# EAGLE board prototype.01 (EAGLE 5.06)
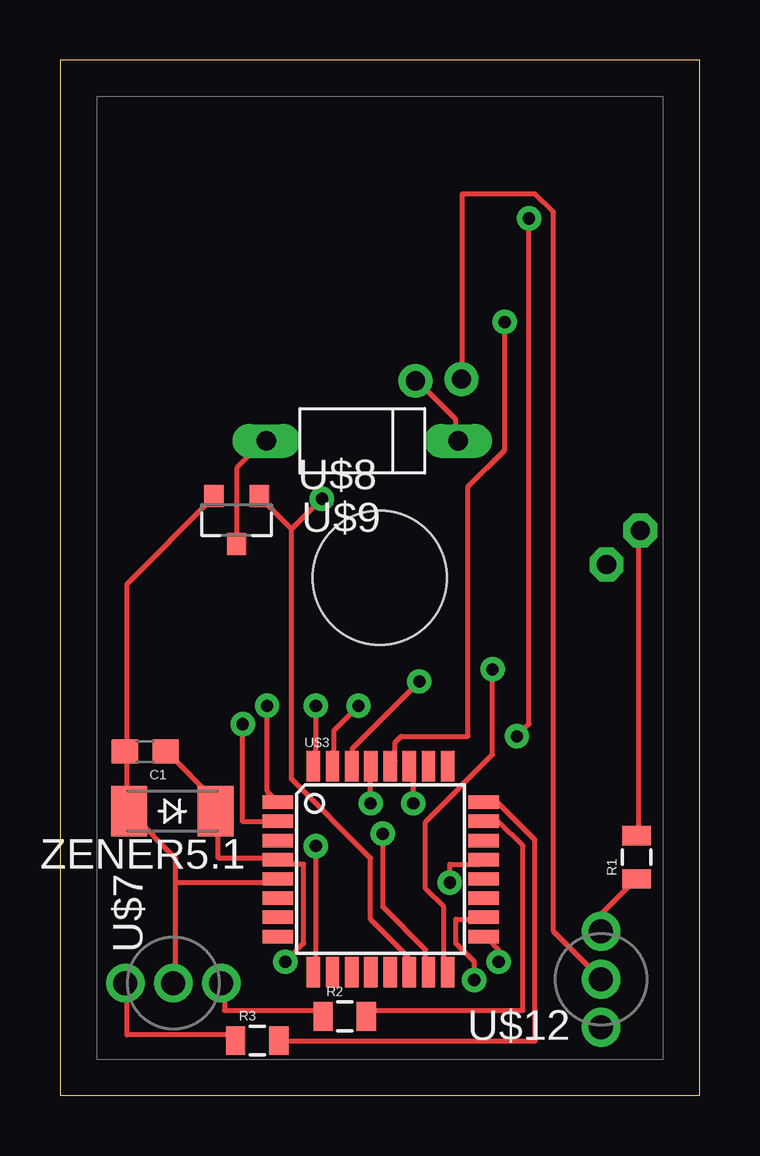
[diagram p0: board, top side]
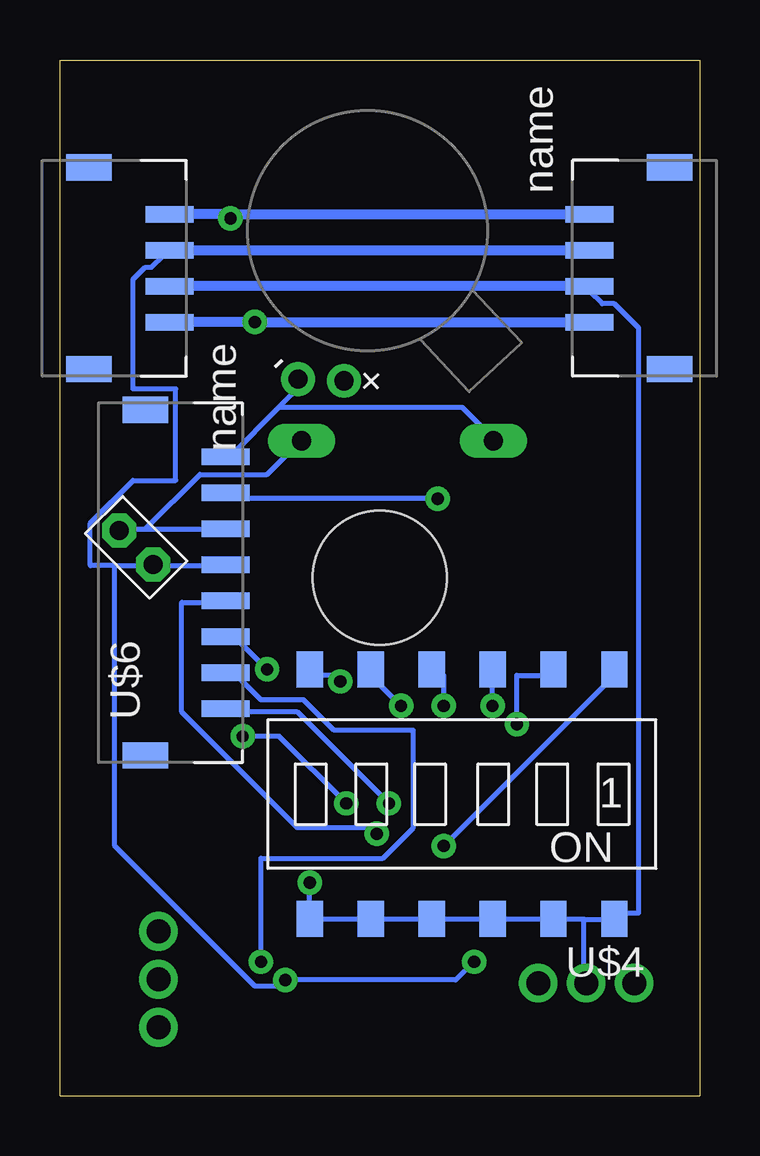
[diagram p1: board, bottom side, seen from below]

Size 26.67 x 43.18 mm. Coordinates in mm from the lower left corner, seen from the top.
Outline: 26.67,0 26.67,43.18 0,43.18 0,0 26.67,0
Copper layers (1*16): Top 0.035mm / dielectric 1.5mm / Bottom 0.035mm
Design rules "SparkFun": minimum track width 8mil, minimum drill 20mil, track to track 8mil, track to pad 8mil, pad to pad 8mil, via to via 8mil, smd to smd 8mil, copper to edge 10mil, drill to drill 8mil, minimum pad ring 12mil, minimum via ring 10mil, stop-mask expansion 4mil, vias tented up to drill 25mil, thermal gap 10mil

## Footprints (pad centres in the part's own frame; a part is rotated, then mirrored left to right if it is on the bottom)
0603 = smd 1.1 x 1: 1 -0.85,0; 2 0.85,0
0805 = smd 0.8 x 1.2: 1 -0.9,0; 2 0.9,0
S4B-ZR-SM4A-TF = smd 0.7 x 2: P$1 -2.25,-2.3; P$2 -0.75,-2.3; P$3 0.75,-2.3; P$4 2.25,-2.3 | smd 1.1 x 1.9: P$5 -4.2,1.05; P$6 4.2,1.05
TQFP32-08 = smd 1.27 x 0.559: 1 -4.293,2.8; 2 -4.293,2; 3 -4.293,1.2; 4 -4.293,0.4; 5 -4.293,-0.4; 6 -4.293,-1.2; 7 -4.293,-2; 8 -4.293,-2.8; 17 4.293,-2.8; 18 4.293,-2; 19 4.293,-1.2; 20 4.293,-0.4; 21 4.293,0.4; 22 4.293,1.2; 23 4.293,2; 24 4.293,2.8 | smd 0.559 x 1.27: 9 -2.8,-4.293; 10 -2,-4.293; 11 -1.2,-4.293; 12 -0.4,-4.293; 13 0.4,-4.293; 14 1.2,-4.293; 15 2,-4.293; 16 2.8,-4.293; 25 2.8,4.293; 26 2,4.293; 27 1.2,4.293; 28 0.4,4.293; 29 -0.4,4.293; 30 -1.2,4.293; 31 -2,4.293; 32 -2.8,4.293
A6S-6104-H = smd 1.1 x 1.5: P$1 -6.35,-5.2; P$2 -3.81,-5.2; P$3 -1.27,-5.2; P$4 1.27,-5.2; P$5 3.81,-5.2; P$6 6.35,-5.2; P$7 -6.35,5.2; P$8 -3.81,5.2; P$9 -1.27,5.2; P$10 1.27,5.2; P$11 3.81,5.2; P$12 6.35,5.2
VIBE-MOTOR-10MM = drill 0.8 round: + -5,-3.9; - -6.35,-2.54
B8B-ZR-SM4A-TF = smd 0.7 x 2: P$1 -5.25,-2.3; P$2 -3.75,-2.3; P$3 -2.25,-2.3; P$4 -0.75,-2.3; P$5 0.75,-2.3; P$6 2.25,-2.3; P$7 3.75,-2.3; P$8 5.25,-2.3 | smd 1.1 x 1.9: P$9 -7.2,1.05; P$10 7.2,1.05
SPR-39 = drill 1 round: AGRN 0,-2; ARED 0,2; CATH 0,0
SOT-23(TO-236) = smd 0.8 x 0.9: P$1GATE 0.95,1; P$2SOURCE -0.95,1; P$3DRAIN 0,-1
59-10 = drill 0.8 long: P$1 0,4; P$2 0,-4
JUMPER-2PIN-2MM = drill 0.8 octagon: P$1 0,1; P$2 0,-1
.22INHOLE = hole 5.588: 0,0
SOD-123_MINI-SMA = smd 1.5 x 2.1: A 1.8,0; C -1.8,0

## Placement (x,y rotation side)
C1  .1uf  [0603]  3.56,14.35 180 top
R1  100  [0805]  24.04,9.95 90 top
R2  470  [0805]  11.87,3.32 0 top
R3  470  [0805]  8.22,2.31 0 top
U$1  S4B-ZR-SM4A-TF  [S4B-ZR-SM4A-TF]  24.4,34.49 90 bottom
U$2  S4B-ZR-SM4A-TF  [S4B-ZR-SM4A-TF]  2.3,34.49 270 bottom
U$3  ATTINY48  [TQFP32-08]  13.37,9.45 0 top
U$4  A6S-6104-H  [A6S-6104-H]  9.91,12.57 180 bottom
U$5  MOTOR10MM  [VIBE-MOTOR-10MM]  13.84,36.07 43.1 bottom
U$6  B8B-ZR-SM4A-TF  [B8B-ZR-SM4A-TF]  22.06,21.39 90 bottom
U$7  SPR-39  [SPR-39]  4.72,4.7 90 top
U$8  NUD3105  [SOT-23(TO-236)]  7.37,24 0 top
U$9  59-10DIODE  [59-10]  12.6,27.3 270 top
U$10  JUMPER-2PIN-2MM  [JUMPER-2PIN-2MM]  23.5,22.86 224.8 bottom
U$11  .22INHOLE  [.22INHOLE]  13.34,21.59 0 top
U$12  SPR-39  [SPR-39]  22.56,4.86 180 top
ZENER5.1  CGRM4001-G  [SOD-123_MINI-SMA]  4.68,11.87 180 top

## Library data of the parts
C1 = SparkFun2
R1-R3 U$3 U$5 = SparkFun
U$1 U$2 U$6 = con-jst-cubic
U$4 = switch-cubic
U$7 U$12 = led-cubic
U$8 = mosfet-cubic
U$9 = diode-cubic
U$10 = jumper-cubic
U$11 = standoff-cubic
ZENER5.1 = diode

## Nets
MISO: U$3.16 U$6.P$3
MOSI: U$3.15 U$6.P$4
N$1: U$3.14 U$6.P$7 U$8.P$1GATE
N$2: R1.1 U$12.AGRN
N$3: U$5.- U$6.P$8 U$8.P$3DRAIN U$9.P$2 U$12.CATH
N$4: R3.2 U$3.24
N$5: R2.2 U$3.23
N$6: U$3.9 U$4.P$1
N$7: U$3.2 U$4.P$2
N$8: U$3.1 U$4.P$3
N$9: U$3.32 U$4.P$4
N$10: U$3.31 U$4.P$5
N$11: U$3.30 U$4.P$6
N$12: U$1.P$1 U$2.P$4 U$3.28
N$13: R2.1 U$7.AGRN
N$14: R3.1 U$7.ARED
N$15: R1.2 U$5.+ U$6.P$6 U$9.P$1 U$10.P$2
RESET: U$3.29 U$6.P$1
SCK: U$3.17 U$6.P$2
SDA: U$1.P$4 U$2.P$1 U$3.27
VCCCLEAN: C1.1 U$1.P$3 U$2.P$2 U$3.4 U$3.18 U$6.P$5 U$10.P$1 ZENER5.1.C
VSS: C1.2 U$1.P$2 U$2.P$3 U$3.5 U$3.21 U$4.P$7 U$4.P$8 U$4.P$9 U$4.P$10 U$4.P$11 U$4.P$12 U$7.CATH U$8.P$2SOURCE ZENER5.1.A

## Tracks (layer width: path | path; a pad name or v marks a point on that pad's centre or on a via)
MISO  (via drill 0.51)
  Top 0.203: v18.03,17.78 18.03,14.22 15.24,11.43 15.24,8.64 16,7.87 16,5.33 U$3.16
  Bottom 0.203: v18.03,17.78 19.3,19.05 19.56,19.05 U$6.P$3
MOSI  (via drill 0.51)
  Top 0.203: v13.46,10.92 13.46,7.87 15.24,6.1 15.24,5.33 U$3.15
  Bottom 0.203: v13.46,10.92 13.72,11.18 16.76,11.18 21.59,16 21.59,20.57 19.81,20.57 U$6.P$4
N$1  (via drill 0.51)
  Top 0.203: 9.65,23.62 8.38,24.89 U$8.P$1GATE | 9.65,23.62 9.65,13.21 12.95,9.91 12.95,7.37 14.48,5.84 14.48,5.33 U$3.14 | 9.65,23.62 v10.92,24.89
  Bottom 0.203: v10.92,24.89 19.56,24.89 U$6.P$7
N$2
  Top 0.203: R1.1 23.88,8.89 22.61,7.62 22.61,6.86 U$12.AGRN
N$3
  Top 0.203: U$8.P$3DRAIN 7.37,26.16 8.38,27.18 U$9.P$2 | U$12.CATH 22.35,5.08 20.57,6.86 20.57,36.83 19.81,37.59 16.76,37.59 16.76,29.97 U$5.-
  Bottom 0.203: 17.53,28.7 16.51,29.72 U$5.- | 17.53,28.7 19.56,26.67 U$6.P$8 | 17.53,28.7 9.91,28.7 8.64,27.43 U$9.P$2
N$4
  Top 0.203: R3.2 9.14,2.29 19.81,2.29 19.81,10.67 18.29,12.19 17.78,12.19 U$3.24
N$5
  Top 0.203: R2.2 12.95,3.56 19.3,3.56 19.3,10.41 18.29,11.43 17.78,11.43 U$3.23
N$6  (via drill 0.51)
  Top 0.203: v10.67,10.41 10.67,5.33 U$3.9
  Bottom 0.203: v10.67,10.41 3.56,17.53 U$4.P$1
N$7  (via drill 0.51)
  Top 0.203: v7.62,15.49 7.62,11.43 8.89,11.43 U$3.2
  Bottom 0.203: v7.62,15.49 7.62,17.53 6.1,17.53 U$4.P$2
N$8  (via drill 0.51)
  Top 0.203: v8.64,16.26 8.64,12.7 8.89,12.45 U$3.1
  Bottom 0.203: v8.64,16.26 U$4.P$3
N$9  (via drill 0.51)
  Top 0.203: v10.67,16.26 10.67,13.97 U$3.32
  Bottom 0.203: v10.67,16.26 10.67,17.53 11.18,17.53 U$4.P$4
N$10  (via drill 0.51)
  Top 0.203: v12.45,16.26 11.43,15.24 11.43,13.97 U$3.31
  Bottom 0.203: v12.45,16.26 13.72,17.53 U$4.P$5
N$11  (via drill 0.51)
  Top 0.203: v14.99,17.27 12.19,14.48 12.19,13.97 U$3.30
  Bottom 0.203: v14.99,17.27 15.24,17.53 16.26,17.53 U$4.P$6
N$12  (via drill 0.51)
  Top 0.203: v18.54,32.26 18.54,26.92 17.02,25.4 17.02,14.99 14.22,14.99 13.97,14.73 13.97,13.97 U$3.28
  Bottom 0.203: v18.54,32.26 18.54,32.24
  Bottom 0.406: U$2.P$4 18.54,32.24 U$1.P$1
N$13
  Top 0.203: R2.1 10.92,3.56 6.86,3.56 6.86,4.57 U$7.AGRN
N$14
  Top 0.203: R3.1 7.11,2.54 2.79,2.54 2.79,4.57 U$7.ARED
N$15
  Top 0.203: U$5.+ 14.99,29.72 16.51,28.19 16.51,27.43 U$9.P$1 | R1.2 24.13,10.92 24.13,23.37 U$10.P$2
  Bottom 0.203: 23.11,23.62 24.13,23.62 U$10.P$2 | 23.11,23.62 19.81,23.62 U$6.P$6 | 23.11,23.62 20.83,25.91 18.03,25.91 16.76,27.18 U$9.P$1
RESET  (via drill 0.51)
  Top 0.203: v12.95,12.19 12.95,13.72 U$3.29
  Bottom 0.203: v12.95,12.19 16.76,16 19.56,16 U$6.P$1
SCK  (via drill 0.51)
  Top 0.203: v18.29,5.59 18.29,6.1 17.78,6.6 U$3.17
  Bottom 0.203: v18.29,5.59 18.29,9.91 13.21,9.91 11.94,11.18 11.94,15.24 15.24,15.24 16.51,16.51 18.29,16.51 19.3,17.53 19.56,17.53 U$6.P$2
SDA  (via drill 0.51)
  Top 0.203: v14.73,12.19 14.73,13.72 U$3.27 | v19.05,14.99 19.56,15.49 v19.56,36.58
  Bottom 0.203: v14.73,12.19 17.53,14.99 v19.05,14.99 | v19.56,36.58 19.56,36.74
  Bottom 0.406: U$2.P$1 19.56,36.74 U$1.P$4
VCCCLEAN  (via drill 0.51)
  Top 0.203: C1.1 4.57,14.22 6.35,12.45 6.35,11.94 ZENER5.1.C 6.6,11.68 6.6,9.91 8.89,9.91 U$3.4 9.14,9.65 10.16,9.65 10.16,6.35 v9.4,5.59 | v17.27,4.83 17.27,5.59 16.51,6.35 16.51,7.37 17.53,7.37 U$3.18
  Bottom 0.203: 24.38,22.1 24.38,10.41 18.54,4.57 17.53,4.57 v17.27,4.83 10.16,4.83 v9.4,5.59 | 24.38,22.1 22.86,22.1 U$10.P$1 22.61,22.1 19.81,22.1 U$6.P$5 | 24.38,22.1 25.4,22.1 25.4,23.88 23.62,25.65 21.84,25.65 21.84,29.46 23.62,29.46 23.62,34.04 23.11,34.54 22.86,34.54 22.35,35.05 U$1.P$3
  Bottom 0.406: U$1.P$3 U$2.P$2
VSS  (via drill 0.51)
  Top 0.203: U$8.P$2SOURCE 6.35,24.89 2.79,21.34 2.79,14.48 C1.2 2.79,14.22 2.79,11.94 ZENER5.1.A 3.05,11.68 4.83,9.91 4.83,8.89 | 4.83,8.89 8.89,8.89 U$3.5 | 4.83,8.89 4.83,4.83 U$7.CATH | v16.26,8.89 16.26,9.65 17.53,9.65 U$3.21
  Bottom 0.203: v16.26,8.89 U$4.P$12 U$4.P$11 | 4.83,7.37 U$4.P$8 | 4.83,7.37 U$4.P$7 3.56,7.62 2.54,7.62 2.54,32 3.56,33.02 4.06,33.02 4.57,33.53 U$2.P$3 | U$4.P$8 U$4.P$9 | U$4.P$8 | U$4.P$9 U$4.P$10 | U$4.P$9 | U$4.P$10 U$4.P$11 | U$4.P$10 | U$4.P$11 | 4.83,7.37 4.83,4.83 U$7.CATH
  Bottom 0.406: U$2.P$3 U$1.P$2

## Text on the board
tLabel: CUbiC | rev .01 | 6/9/2009 | J1 | J2 | D1 | T3 | MOSFET | J3 | Short (grn) | C1 | D2 | R1 | Long | (red) | LED1 | LED2 | R2 | R3